# Altium PCB Power splitter.PcbDoc
Units mm, origin at the board's own origin, x right, y up, seen from the top; angles counter-clockwise.
Board outline 70.4 x 119.12 mm, 2 copper layers (Top Layer, Bottom Layer); 3 components, 6 nets, 16 pads, 0 vias.
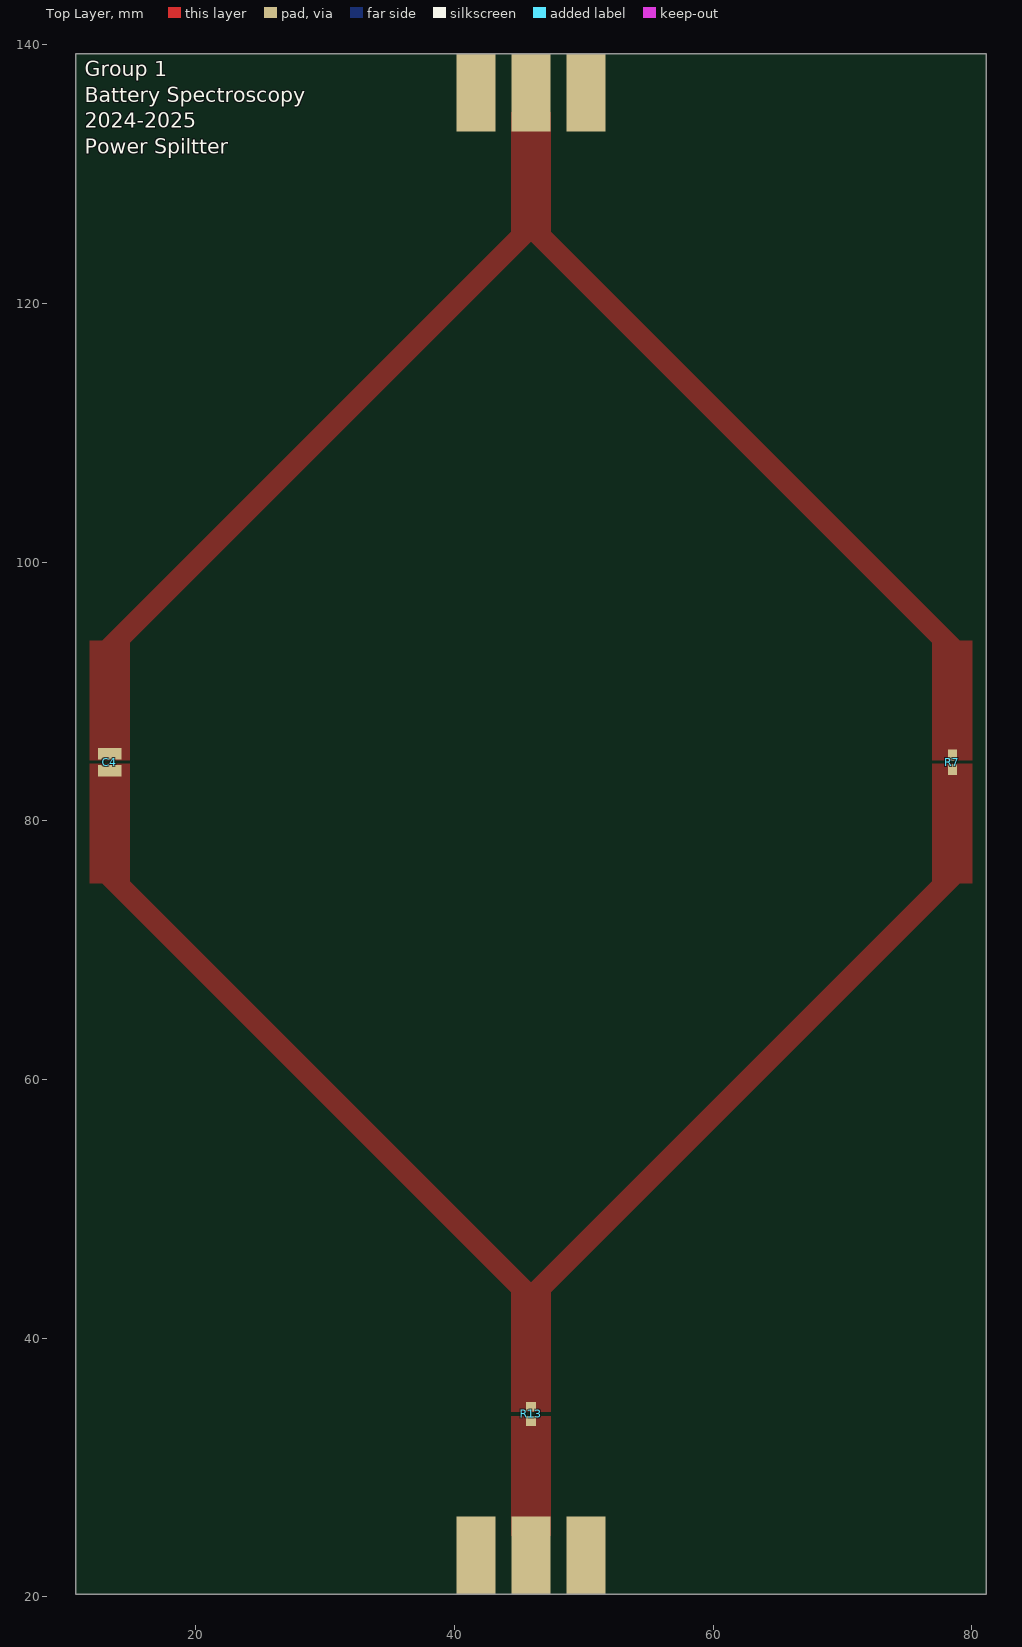
[diagram p0: Top Layer view]
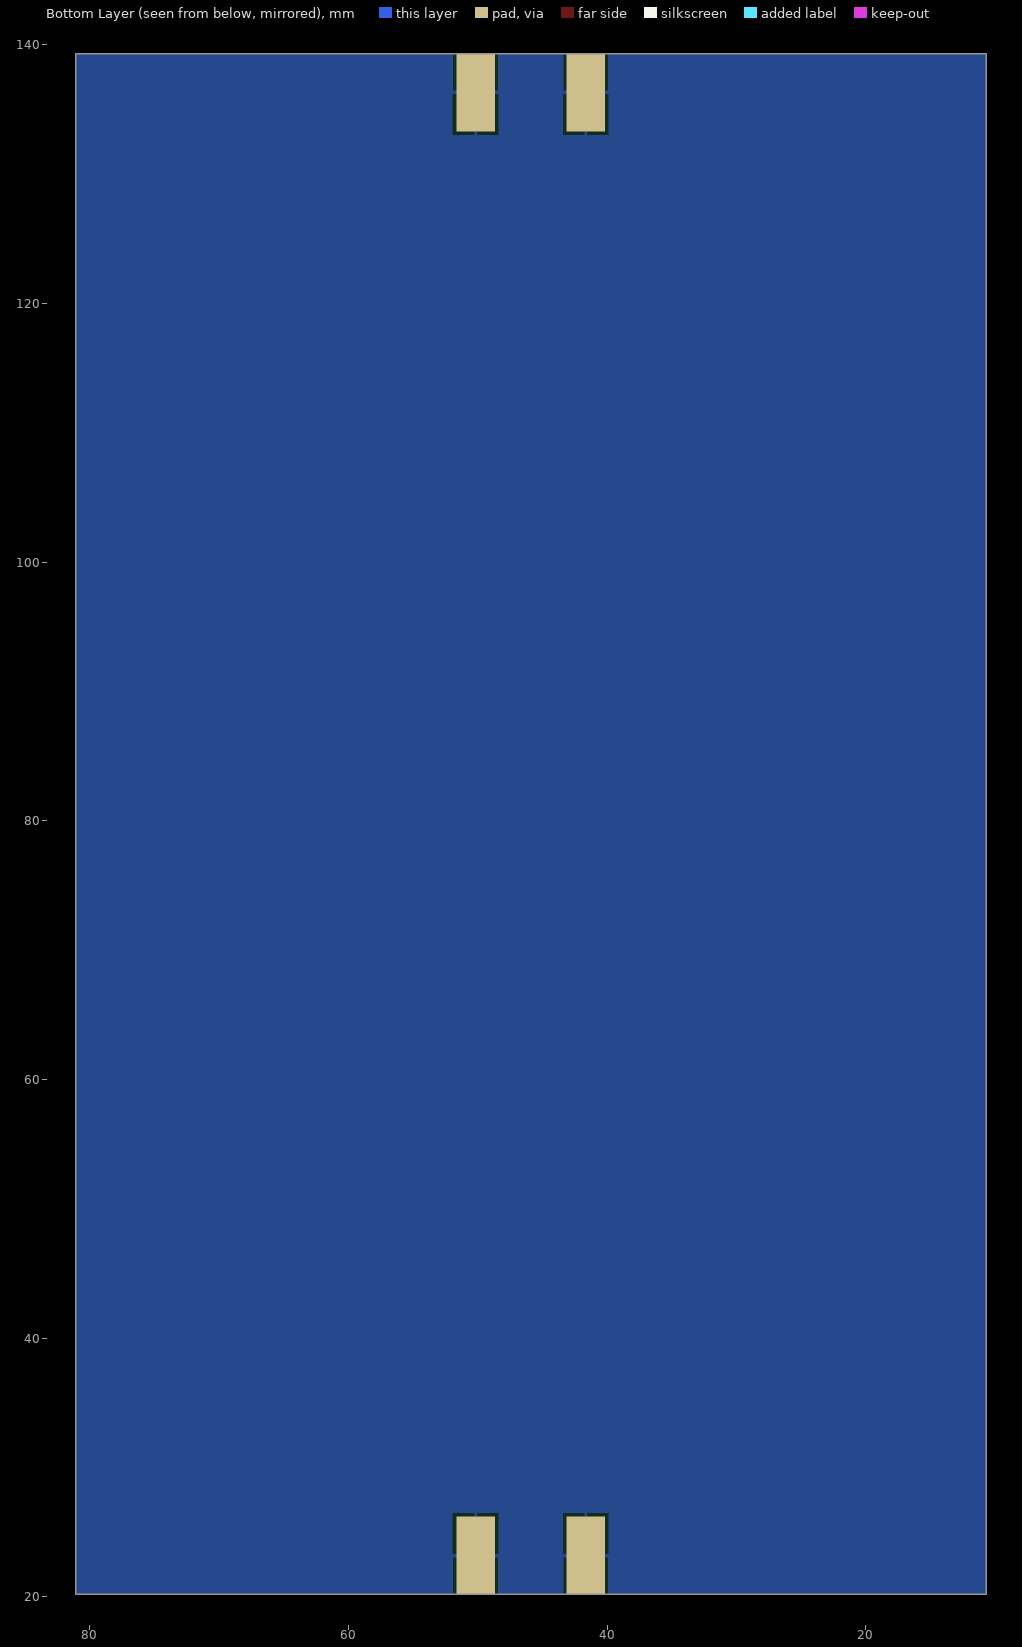
[diagram p1: Bottom Layer view, seen from below]
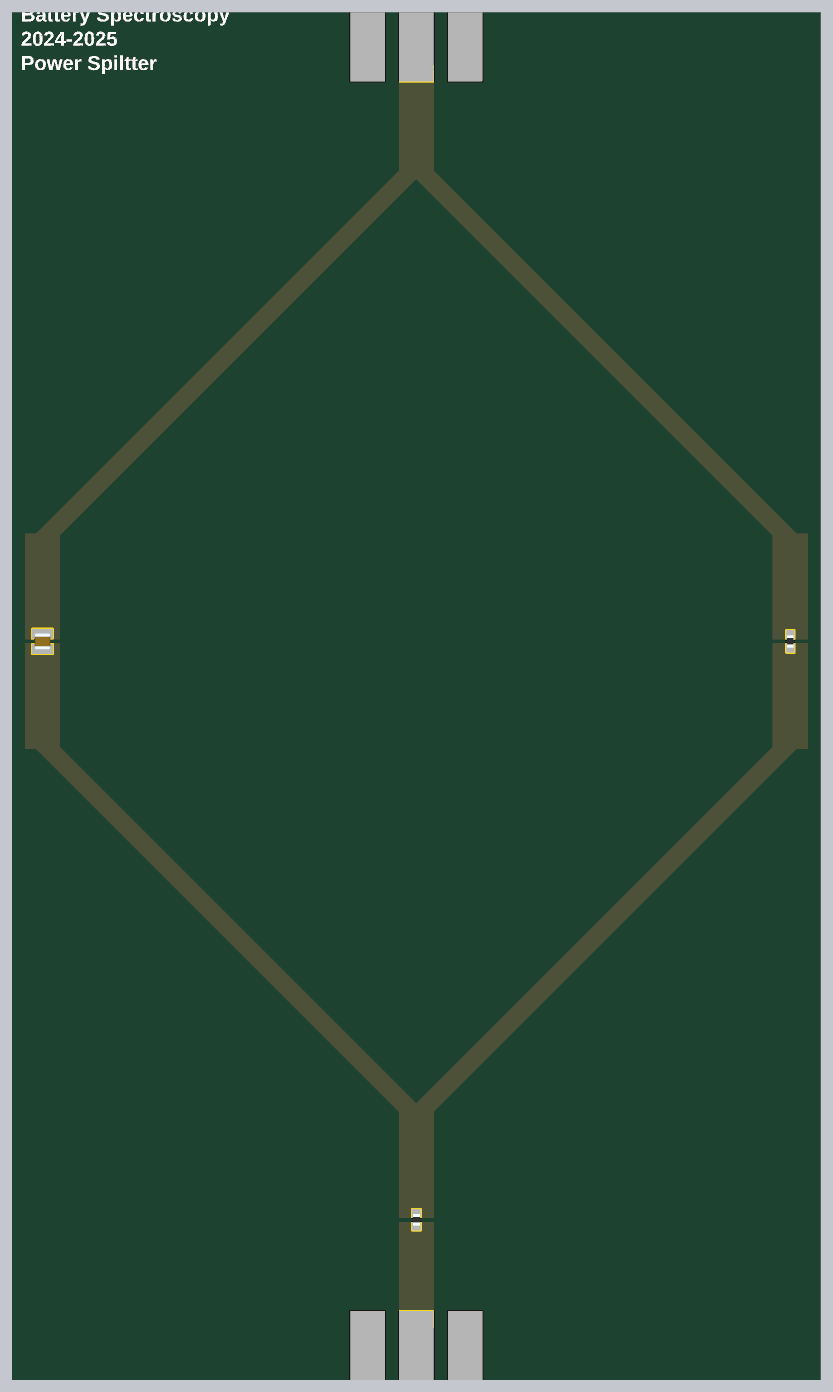
[diagram p2: 3D render of the assembled board from above, using the file's embedded part models]

## Layer stack, top to bottom
Top Solder: solder mask 0.0102, Solder Resist, Dk 3.5
Top Layer: signal copper 0.0356
Dielectric 1: dielectric 0.32, FR-4, Dk 4.8
Bottom Layer: signal copper 0.0356
Bottom Solder: solder mask 0.0102, Solder Resist, Dk 3.5

## Board outline
10.7,20.2 10.7,139.324 81.1,139.324 81.1,20.2

## Design rules (kind name [scope] priority, off if disabled: settings)
Clearance [All] p1: gap=0.254 ignorepadtopadclearanceinfootprint=FALSE
PlaneConnect [All] p1: planeconnectstyle=Direct reliefexpansion=0.508 reliefentries=4 reliefconductorwidth=0.254 reliefairgap=0.254
PolygonConnect [All] p1: connectstyle=Direct reliefconductorwidth=0.254 reliefentries=4 polygonreliefangle="90 Angle" airgapwidth=0.254
RoutingVias [All] p1: holewidth=0.711 width=1.27 viastyle="Through Hole" minholewidth=0.711 minwidth=1.27 maxholewidth=0.711 maxwidth=1.27
SolderMaskExpansion [All] p1: expansion=0.102 istentingtop=FALSE
SupplyNets "Schematic Supply Nets" [InNet('GND')] p1: voltage=0.000
Width [All] p1: maxlimit=0.254 minlimit=0.254 preferedwidth=0.254
29 further rules are at their usual default settings.

## Components (designator, comment, footprint, x,y, rotation, side; value= is the part's Value field where it differs from the comment)
C4 "200A472MT50XT" CAPC1514X145N 13.336,84.536 r90 top
R7 "FC0402E1001DTT5" RESC1106X42N 78.492,84.536 r90 top
R13 "CH0402-500RGFPT" RESC1006X63N 45.914,34.136 r90 top

## Footprints (in the part's own frame and the unit in brackets; to place one, negate y for a bottom-side part, rotate by r counter-clockwise, add the part's x,y. Pads: shape width x height; smd on the part's side, far side on the other; paste and mask are expansions set on the pad)
CAPC1514X145N [mm]
  rect 0.89x1.79 smd: 1(-0.65,0) 2(0.65,0)
  body extent -0.73,-0.7 0.73,0.7, height 1.45
RESC1006X63N [mm]
  rect 0.75x0.75 smd: 1(-0.55,0) 2(0.55,0)
  body extent -0.5,-0.3 0.5,0.3, height 0.63
RESC1106X42N [mm]
  rect 0.85x0.7 smd: 1(-0.55,0) 2(0.55,0)
  body extent -0.53,-0.28 0.53,0.28, height 0.42

## Part data
C4: "Capacitor", Manufacturer_Name="Kyocera AVX", Datasheet Link=https://datasheets.kyocera-avx.com/200A.pdf, Height=1.45mm, Manufacturer_Part_Number=200A472MT50XT
R7: "Resistor", Manufacturer_Name=Vishay, Mouser Part Number=71-FC0402E1001DTT5, Datasheet Link=https://www.vishay.com/docs/60093/fcseries.pdf, Height=0.419mm, Manufacturer_Part_Number=FC0402E1001DTT5, Mouser Price/Stock=https://www.mouser.co.uk/ProductDetail/Vishay-Thin-Film/FC0402E1001DTT5?qs=j%252B1pi9TdxUZDQ%252BI47GWCkg%3D%3D
R13: "Resistor", Manufacturer_Name=Vishay, Mouser Part Number=71-CH0402-500RGFPT, Datasheet Link=https://componentsearchengine.com/Datasheets/2/CH0402-500RGFPT.pdf, Height=0.627mm, Manufacturer_Part_Number=CH0402-500RGFPT, Mouser Price/Stock=https://www.mouser.co.uk/ProductDetail/Vishay-Sfernice/CH0402-500RGFPT?qs=viaqaOk9TMQvbMBtnMpE1w%3D%3D

## Free pads (board coordinates)
  rect 3x6 smd: +6(41.659,136.324) +6(41.659,23.186) +6(45.914,136.324) +6(45.914,23.186) +6(50.169,136.324) +6(50.169,23.186)
  rect 3x6 smd far side: +6(41.659,136.324) +6(41.659,23.186) +6(50.169,136.324) +6(50.169,23.186)

## Nets (pads, with @x,y where several pads share a name; then routed paths per layer and width w, separated by ;. In a path a pad name is that pad's centre, name@x,y a point inside that pad or via, vN(x,y) a via of type N, cw(c..) or ccw(c..) an arc to the next point about the centre after c; other vN are vias at no path point)
GND: pad.+6@41.659,23.186 pad.+6@41.659,136.324 pad.+6@50.169,23.186 pad.+6@50.169,136.324
NetC4_1: C4.1 R7.1 R13.2
NetC4_2: C4.2 pad.+6@45.914,136.324 R7.2
NetH1_1: 
NetJ1_1: 
NetJ3_1: pad.+6@45.914,23.186 R13.1

## Polygon pours and split planes (outlines as drawn)
NetC4_2 on Top Layer "NONET_L-01_P-001" (solid, pour order 12): 11.798,93.944 14.875,93.944 14.875,84.698 11.798,84.698
NetC4_2 on Top Layer "NONET_L-01_P-001" (solid, pour order 11): 76.953,93.944 80.03,93.944 80.03,84.698 76.953,84.698
NetC4_2 on Top Layer "NONET_L-01_P-001" (solid, pour order 10): 45.341,126.522 46.487,125.376 13.909,92.799 12.763,93.944
NetC4_2 on Top Layer "NONET_L-01_P-001" (solid, pour order 9): 46.487,126.522 45.341,125.376 77.919,92.799 79.065,93.944
NetC4_2 on Top Layer "NONET_L-01_P-001" (solid, pour order 8): 44.375,134.795 47.452,134.795 47.452,125.549 44.375,125.549
NetJ3_1 on Top Layer "NONET_L-01_P-001" (solid, pour order 5): 44.375,33.961 47.452,33.961 47.452,24.715 44.375,24.715
NetC4_1 on Top Layer "NONET_L-01_P-001" (solid, pour order 4): 80.03,75.162 76.953,75.162 76.953,84.408 80.03,84.408
NetC4_1 on Top Layer "NONET_L-01_P-001" (solid, pour order 3): 14.875,75.162 11.798,75.162 11.798,84.408 14.875,84.408
NetC4_1 on Top Layer "NONET_L-01_P-001" (solid, pour order 2): 46.487,42.584 45.341,43.73 77.919,76.308 79.065,75.162
NetC4_1 on Top Layer "NONET_L-01_P-001" (solid, pour order 1): 45.341,42.584 46.487,43.73 13.909,76.308 12.763,75.162
NetC4_1 on Top Layer "NONET_L-01_P-001" (solid, pour order 0): 47.452,34.311 44.375,34.311 44.375,43.557 47.452,43.557
GND on Bottom Layer "NONET_L-01_P-001" (solid, pour order 13): 10.7,20.2 10.7,139.324 81.1,139.324 81.1,20.2

## Silkscreen, mask and mechanical layers (free items; w line width, h text height)
Top Overlay:
  text "Group 1 / Battery Spectroscopy / 2024-2025 / Power Spiltter" at 11.4,131.2 h2
Board Shape:
  the board outline again, w0.013